# Altium PCB controller.PcbDoc
Units mil, origin at the board's own origin, x right, y up, seen from the top; angles counter-clockwise.
Board outline 2330 x 2070 mil, 2 copper layers (Top Layer, Bottom Layer); 29 components, 28 nets, 115 pads, 8 vias.
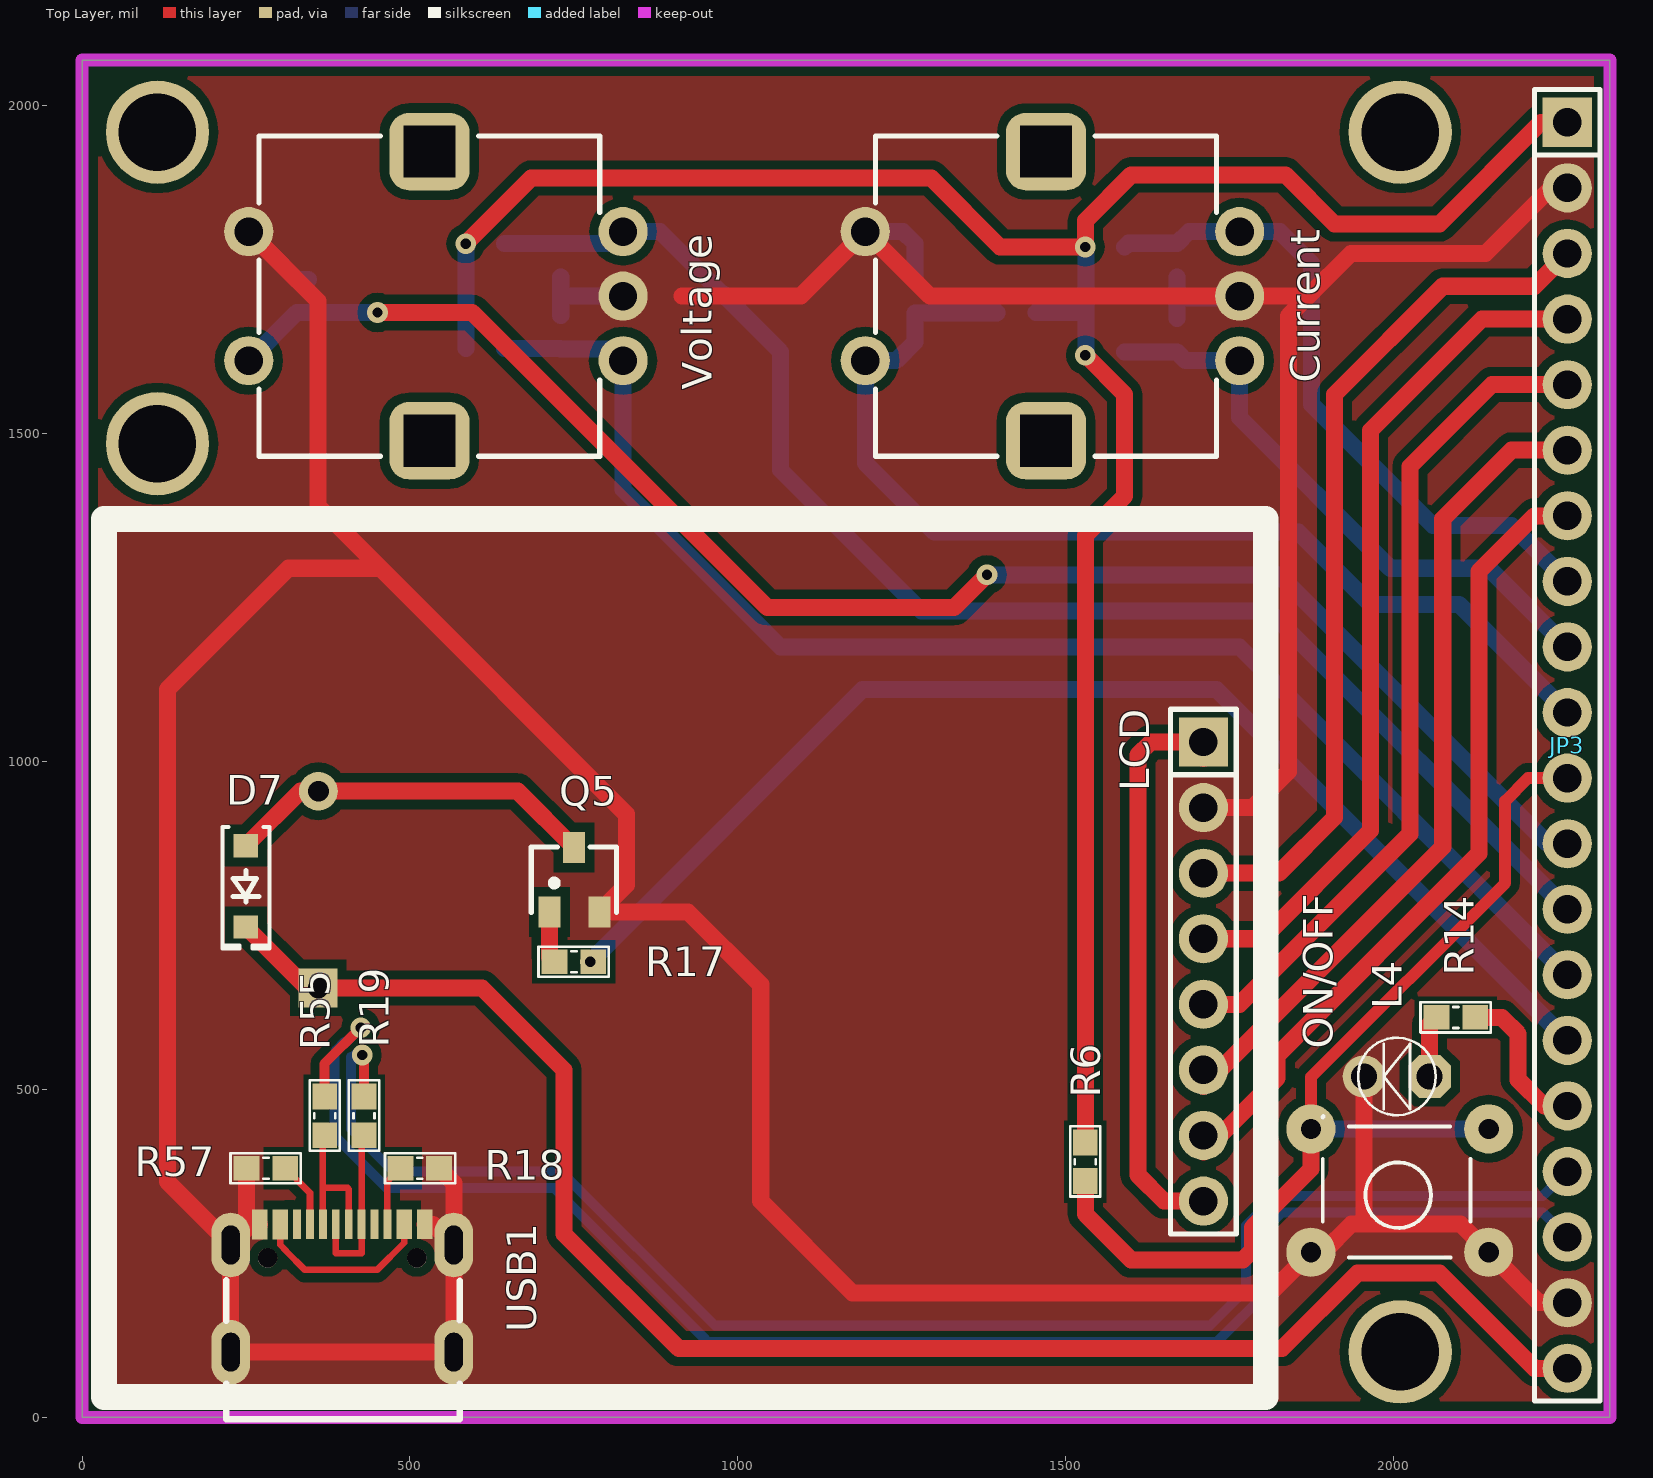
[diagram p0: Top Layer view]
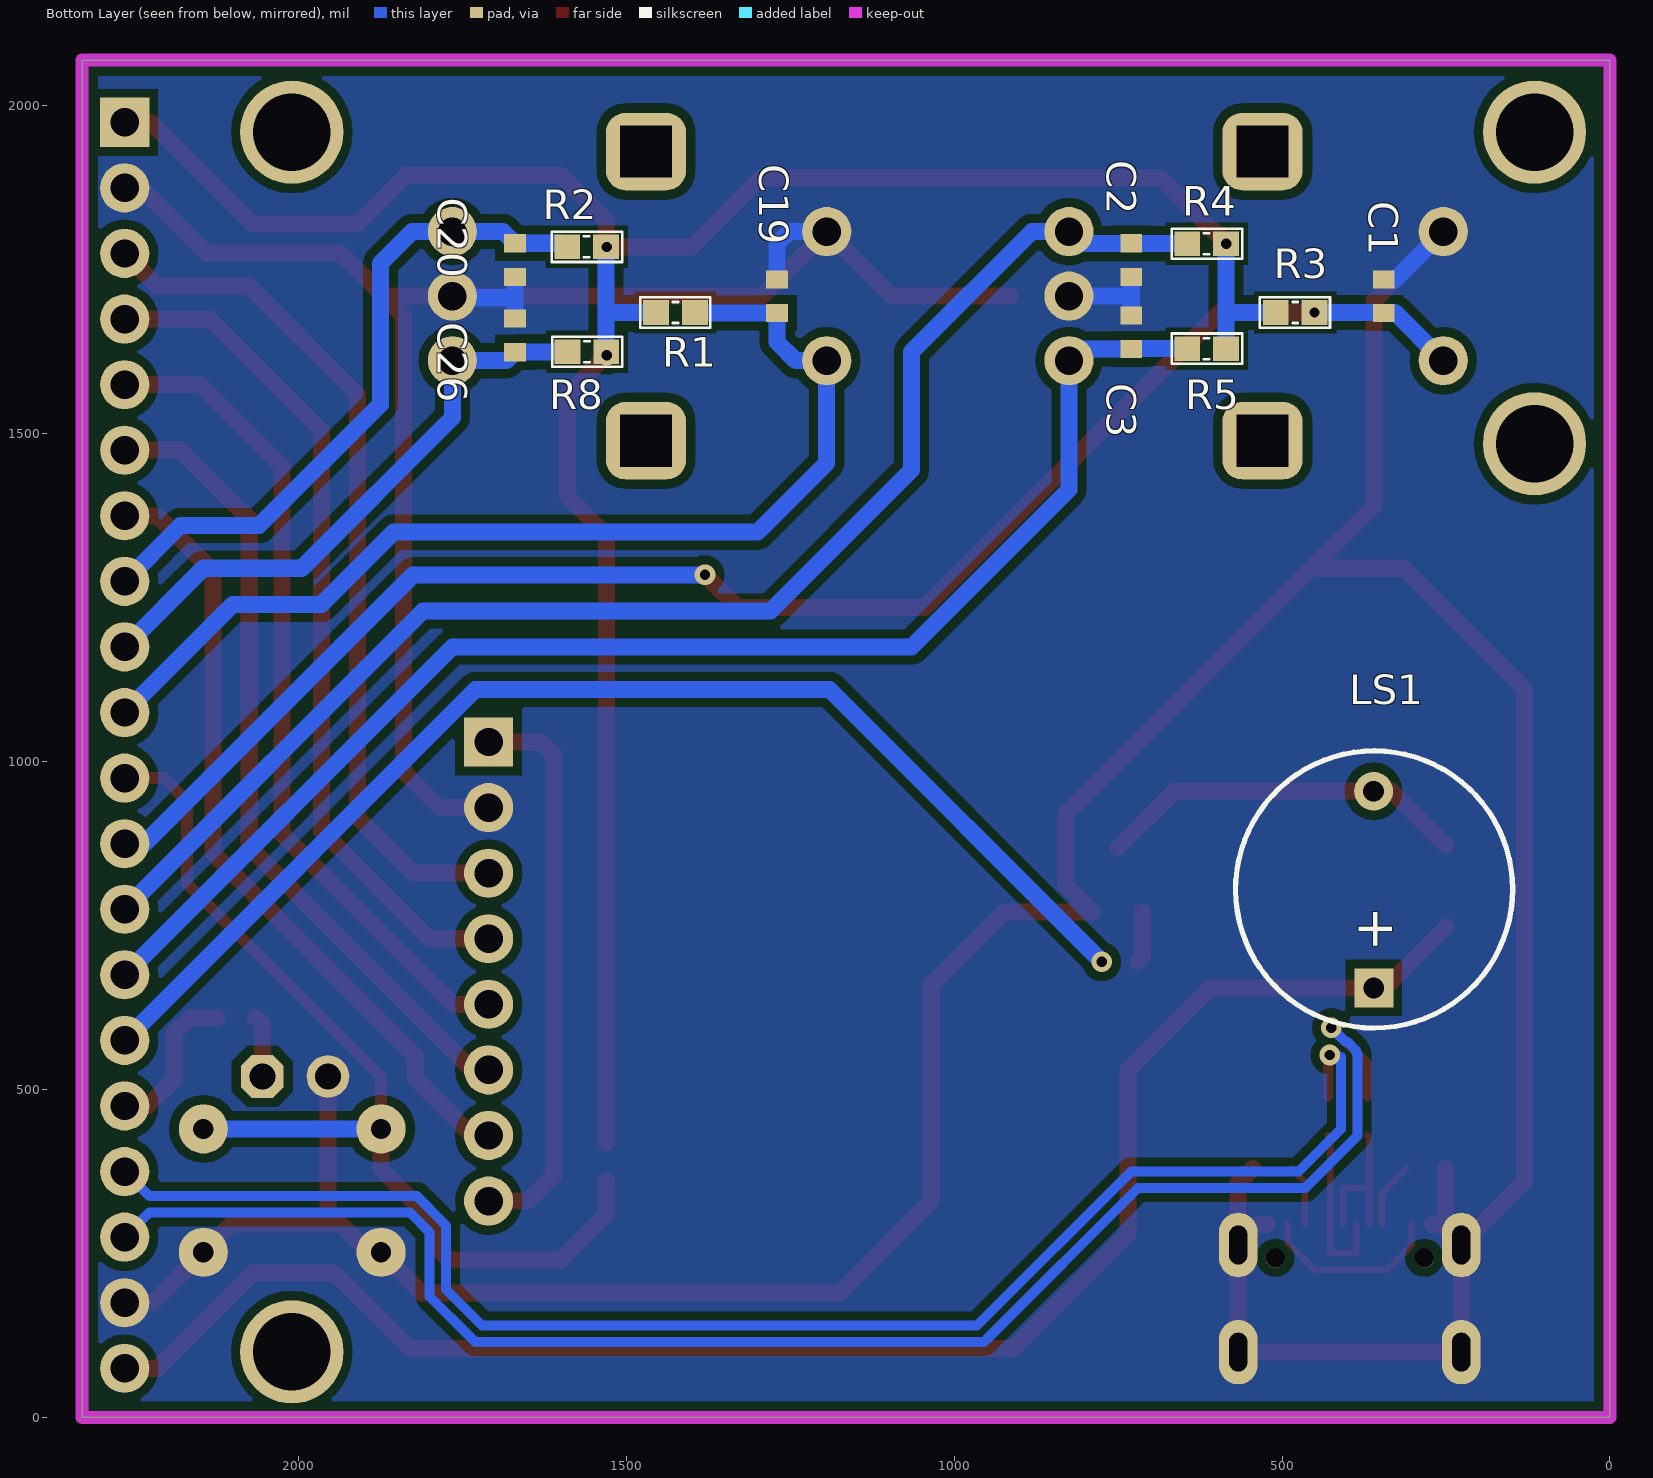
[diagram p1: Bottom Layer view, seen from below]
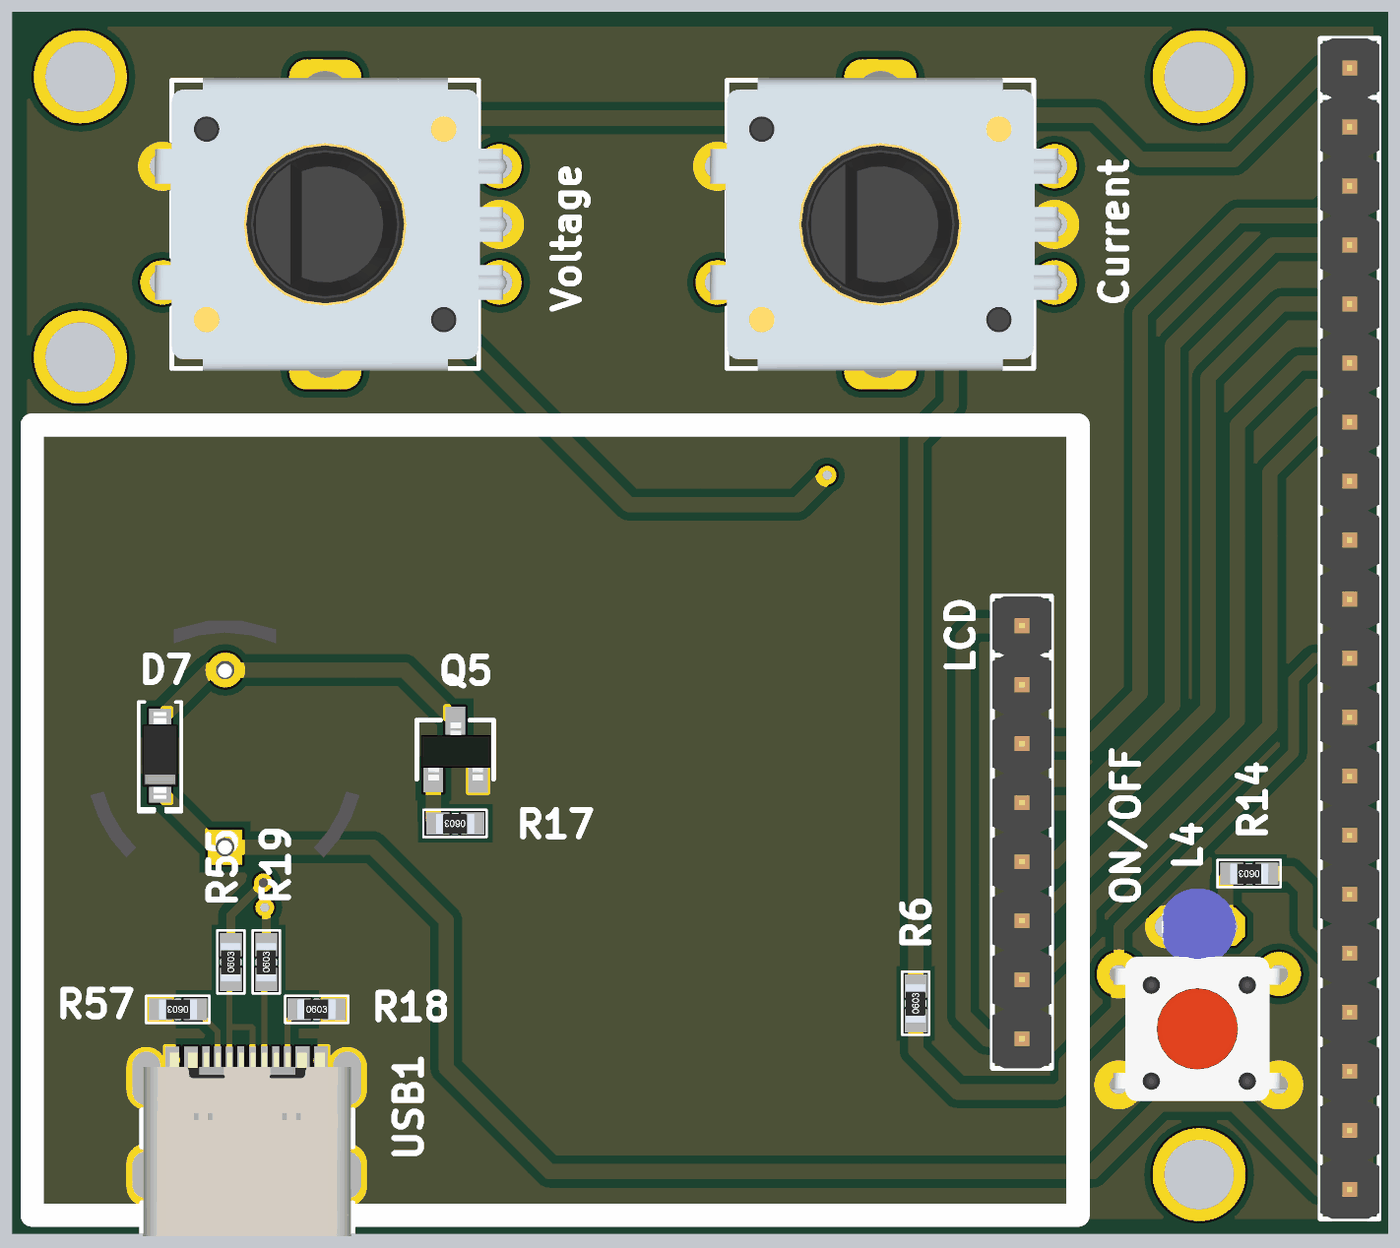
[diagram p2: 3D render of the assembled board from above, using the file's embedded part models]
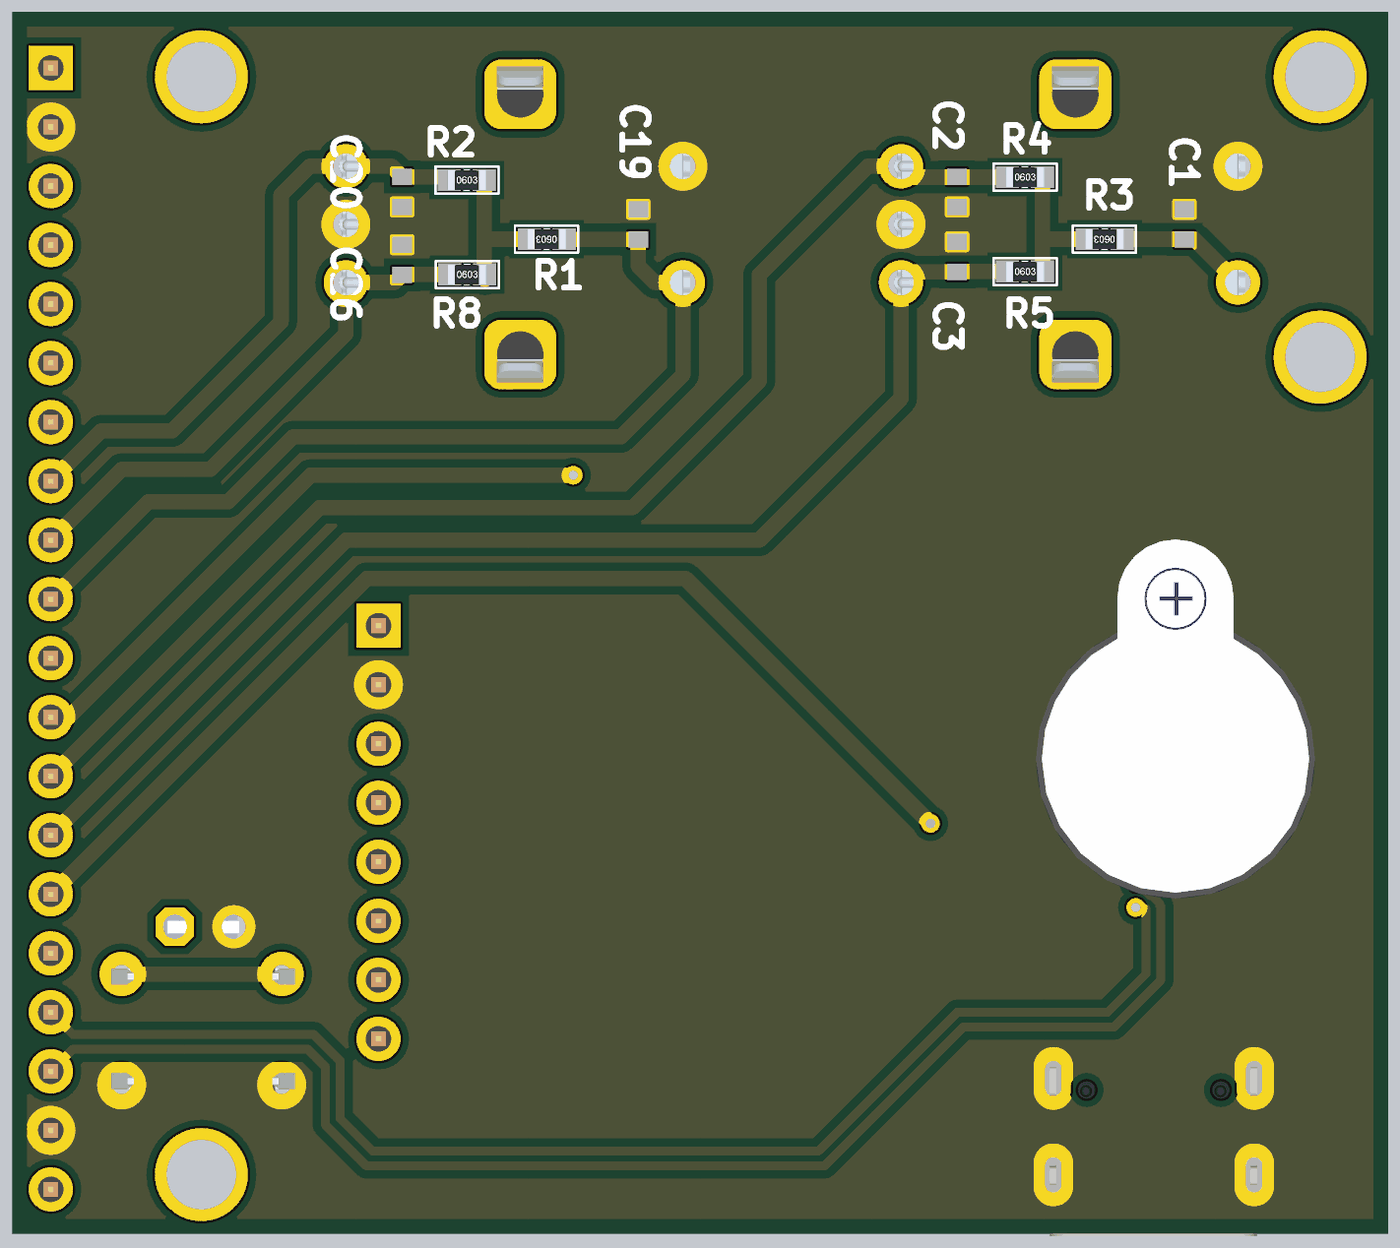
[diagram p3: 3D render of the assembled board from below, using the file's embedded part models]

## Layer stack, top to bottom
Top Solder: solder mask 0.4, Solder Resist, Dk 3.5
Top Layer: signal copper 1.4
Dielectric 1: dielectric 12.6, FR-4, Dk 4.8
Bottom Layer: signal copper 1.4
Bottom Solder: solder mask 0.4, Solder Resist, Dk 3.5

## Board outline
0,0 0,2070 2330,2070 2330,0

## Design rules (kind name [scope] priority, off if disabled: settings)
Clearance [All] p1: gap=14 ignorepadtopadclearanceinfootprint=FALSE
DiffPairsRouting [All] p1: maxlimit=10 minlimit=8 mostfreqgap=10 toplayer_minwidth=8 toplayer_maxwidth=15 toplayer_prefwidth=10 bottomlayer_minwidth=8 bottomlayer_maxwidth=15 bottomlayer_prefwidth=10 maxuncoupledlength=500
PolygonConnect [All] p1: connectstyle=Direct reliefconductorwidth=10 reliefentries=4 polygonreliefangle="90 Angle" airgapwidth=10
RoomDefinition controller [InComponentClass('controller')] p1: confinementstyle=ConfineIn formatcopy=TRUE lockcomponents=FALSE outline 2770,-1440 9400,-1440 9400,680 2770,680
RoutingVias [All] p1: holewidth=15.75 width=31.5 viastyle="Through Hole" minholewidth=15.75 minwidth=31.5 maxholewidth=15.75 maxwidth=31.5
SolderMaskExpansion [All] p1: expansion=4 istentingtop=FALSE
Width [All] p1: maxlimit=26 minlimit=10 preferedwidth=18
29 further rules are at their usual default settings.

## Classes and differential pairs
differential pair USB: +USB_P -USB_N

## Components (designator, comment, footprint, x,y, rotation, side; value= is the part's Value field where it differs from the comment)
C1 "0.1uF" CAPC1608X09L 345,1710 r270 bottom
C2 "0.1uF" CAPC1608X09L 730,1765 r90 bottom
C3 "0.1uF" CAPC1608X09L 730,1655 r270 bottom
C19 "0.1uF" CAPC1608X09L 1270,1710 r270 bottom
C20 "0.1uF" CAPC1608X09L 1670,1765 r90 bottom
C26 "0.1uF" CAPC1608X09L 1670,1650 r270 bottom
Current "482024764004" 482024764004 1470,1710 r0 top locked (schematic designator SW1)
D7 "S4" "DIODE SOD-123" 250,810 r270 top
JP3 "JP 1x20 2.54" "JP 1x20 DT" 2265,1975 r270 top
L4 "LED 3mm" LED-3MM-BLUE 2000,520 r180 top
LCD "lcd_1.8 inch" "JP 1x8 DT" 1710,1030 r270 top (schematic designator JP4)
LS1 "Coi Chip Speaker" "Coi Chip Speacker" 360,655 r90 bottom
ON/OFF "Nut Nhan 4 Chan Cam 6x6" "Nut Nhan 4 Chan Cam 6x6" 2132,244 r180 top (schematic designator BT?)
Q5 "HF" SOT-23 750,820 r0 top value=C9014
R1 "10k" "Tro smd 0603" 1425,1685 r0 bottom
R2 "10k" "Tro smd 0603" 1560.47,1785 r180 bottom
R3 "10k" "Tro smd 0603" 480,1685 r0 bottom
R4 "10k" "Tro smd 0603" 615,1790 r180 bottom
R5 "10k" "Tro smd 0603" 615,1630 r180 bottom
R6 "470RT" "Tro smd 0603" 1530,390 r90 top
R8 "10k" "Tro smd 0603" 1560,1625 r180 bottom
R14 "470RT" "Tro smd 0603" 2095,610 r180 top
R17 "4.7K" "Tro smd 0603" 750,695 r180 top
R18 "5k1" "tro smd 0603" 515,380 r0 top
R19 "10R" "Tro smd 0603" 430,460 r90 top
R55 "10R" "Tro smd 0603" 370,460 r90 top
R57 "5k1" "tro smd 0603" 280.47,380 r180 top
USB1 "Type C 16P" "Type C 16P" 380,145 r0 top
Voltage "482024764004" 482024764004 529.72,1710 r0 top (schematic designator SW2)

## Footprints (in the part's own frame and the unit in brackets; to place one, negate y for a bottom-side part, rotate by r counter-clockwise, add the part's x,y. Pads: shape width x height; smd on the part's side, far side on the other; paste and mask are expansions set on the pad)
482024764004 [mm]
  round 1.905 hole 1.1: 1(-7,-2.5) 2(-7,2.5) A(7.5,-2.5) B(7.5,2.5) C(7.5,0)
  rrect50% 3.1x3 hole 2 square: S1(0,5.6) S2(0,-5.6)
  silkscreen extent -6.6,-6.2 6.6,6.2, body extent -7.32,-6.81 7.8,6.81, height 20.1
CAPC1608X09L [mm]
  rect 0.7x0.85 smd: 1(-0.65,0) 2(0.65,0)
  body extent -0.85,-0.45 0.85,0.45, height 0.9
"Coi Chip Speacker" [mm]
  rect 1.5x1.5 hole 0.8: 1(0,0)
  round 1.5 hole 0.8: 2(7.62,0.013)
  silkscreen extent -1.55,-5.38 9.18,5.36, body extent -2.22,-6 13.24,6, height 4.5
"DIODE SOD-123" [mm] "SOD-123"
  rect 0.9x0.95 smd: 1(-1.575,0) 2(1.575,0)
  silkscreen extent -2.3,-0.92 2.41,0.92, body extent -1.86,-0.78 1.86,0.77, height 1.35
"JP 1x8 DT" [mm] "8 pins, 1 row, straight, gold plating"
  rect 1.905x1.905 hole 1.1: 1(0,0)
  round 1.905 hole 1.1: 2(2.54,0) 3(5.08,0) 4(7.62,0) 5(10.16,0) 6(12.7,0) 7(15.24,0) 8(17.78,0)
  silkscreen extent -1.27,-1.27 19.05,1.27, body extent -1.27,-1.27 19.05,1.27, height 8.54
"JP 1x20 DT" [mm] "20 pins, 1 row, straight, gold plating"
  rect 1.905x1.905 hole 1.1: 1(0,0)
  round 1.905 hole 1.1: 2(2.54,0) 3(5.08,0) 4(7.62,0) 5(10.16,0) 6(12.7,0) 7(15.24,0) 8(17.78,0) 9(20.32,0) 10(22.86,0) 11(25.4,0) 12(27.94,0) 13(30.48,0) 14(33.02,0) 15(35.56,0) 16(38.1,0) 17(40.64,0) 18(43.18,0) 19(45.72,0) 20(48.26,0)
  silkscreen extent -1.27,-1.27 49.53,1.27, body extent -1.27,-1.27 49.53,1.27, height 8.54
LED-3MM-BLUE [mil]
  oct 65x65 hole 40: 1(-55,0)
  round 65 hole 40: 2(45,0)
  silkscreen extent -64,-59 54,59, body extent -72,-65 54,65, height 184
"Nut Nhan 4 Chan Cam 6x6" [mil] "SW button 4pin, 250 x250 mil"
  round 75 hole 31: 1(-13,-8) 1(258,-8) 2(-13,-196) 2(258,-196)
  silkscreen extent 15,-215 240,0, body extent -31,-225 281,19, height 276
SOT-23 [mm] "SOT 23 _ 1-3-2"
  rect 0.85x1.2 smd: 1(-0.94,-1.245) 2(0.985,-1.25) 3(0.005,1.25)
  silkscreen extent -1.65,-1.27 1.65,1.27, body extent -1.47,-1.33 1.53,1.17, height 1.06
"Tro smd 0603" [mm] "Chip Capacitor, 2-Leads, Body 1,60x0,80mm, IPC Medium Density"
  rect 1x0.95 smd mask+0.076: 1(-0.75,0) 2(0.75,0)
  silkscreen extent -1.35,-0.58 1.37,0.58, body extent -0.82,-0.42 0.82,0.43, height 0.44
"tro smd 0603" [mm] "Chip Capacitor, 2-Leads, Body 1,60x0,80mm, IPC Medium Density"
  rect 1x0.95 smd mask+0.076: 1(-0.75,0) 2(0.75,0)
  silkscreen extent -1.35,-0.58 1.37,0.58, body extent -0.82,-0.42 0.82,0.43, height 0.44
"Type C 16P" [mm]
  oval 1.5x2.5 hole 0.7 slot 1.5 at 90 deg: 0(-3.893,-1.152) 0(-3.893,2.998) 0(4.747,-1.152) 0(4.747,2.998)
  rect 0.6x1.15 smd: A1(-2.773,3.793) A4(-1.973,3.793) A9(2.827,3.797) A12(3.627,3.797)
  rect 0.3x1.15 smd: A5(-0.823,3.798) A6(0.177,3.798) A7(0.677,3.796) A8(1.677,3.798) B5(2.177,3.798) B6(1.177,3.798) B7(-0.323,3.796) B8(-1.323,3.797)
  round 0.75 hole 0.75 unplated: ""(-2.463,2.498) ""(3.317,2.498)
  silkscreen extent -4.07,-3.75 4.98,1.62, body extent -4.02,-3.8 4.92,4.1, height 3.21

## Part data
C1 C2 C3 C19 C20 C26: library part GRM188R71H104KA93D, "CAP CER 0.1UF 50V X7R 0603", Manufacturer="Murata Electronics North America", Operating Temperature="-55°C ~ 125°C", Package / Case="0603 (1608 Metric)", Ratings=-, Supplier Part Number 1=490-1519-2-ND, Temperature Coefficient=X7R, Tolerance=±10%, Voltage - Rated=50V, Applications="General Purpose", Capacitance=0.1uF, Category=Capacitors, ComponentLink1Description=http://www.murata.com/~/media/webrenewal/support/library/catalog/products/capacitor/mlcc/c02e.ashx?la=en-us, ComponentLink1URL=http://www.murata.com/~/media/webrenewal/support/library/catalog/products/capacitor/mlcc/c02e.ashx?la=en-us, Features=-, Height - Seated (Max)=-, Lead Spacing=-, Lead Style=-, Manufacturer Part Number=GRM188R71H104KA93D, Mounting Type="Surface Mount, MLCC", Packaging="Tape & Reel (TR)", Part Status=Active, Pricing 1="4000=0.01822, 8000=0.01663, 12000=0.01584 (USD)", Pricing 2="1=0.12, 10=0.084, 100=0.0396, 500=0.02778, 1000=0.023 (USD)", RoHS="RoHS Compliant", Size / Dimension="0.063\" L x 0.032\" W (1.60mm x 0.80mm)", Stock=19812000, Supplier 1=Digi-Key, Supplier 2=Digi-Key, Supplier Part Number 2=490-1519-1-ND, Thickness (Max)="0.035\" (0.90mm)"
Current Voltage: "WS-ENTV Mechanical Incremental Encoder Switch, Plastic Shaft without bushing, 24Pulse/360°, 24positi", Insulation Resistance=100MΩ, Manufacturer="Wurth Elektronik", Operating Temperature Max=85°C, Operating Temperature Min=-40°C, Rated Current=10mA, Category="Encoder Switches", ComponentLink1Description="Website Link", ComponentLink1URL=https://www.we-online.com/redexpert/article/482024764004?ad, ComponentLink2Description="Datasheet Link", ComponentLink2URL=https://www.we-online.com/redexpert/spec/482024764004?ad, Detent=24positions, Electrical Life Encoder=30000Cycles, Electrical Life Switch=20000Cycles, Height=20mm, Length=13.2mm, Manufacturer Part Number=482024764004, Match Code=WS-ENTV, Mount="Through Hole", Operation Force=300g, Packaging=Tray, Resolution=24Pulse/360°, Width=12.4mm
D7: library part "Diode S4", "Dán", Chung_Loai=Dán, Don_Vi=Con, Ma_Hang=MH005519, Ten_Linh_Kien="Diode S4 SOD123 ( 1N5819 SOD123)"
JP3: library part "JP 1x20 2.54 Duc Thang", "Cắm", Chung_Loai=Cắm, Don_Vi=Con, Ma_Hang=MH000903, Ten_Linh_Kien="Jump Đơn Đực 2.54MM 1x40P Thẳng 11MM"
L4: library part "LED 3mm Xanh Duong", "Cắm", Chung_Loai=Cắm, Don_Vi=Con, Ma_Hang=MH009003, Ten_Linh_Kien="LED 3MM Xanh Dương SS (1000c)"
LCD: library part "JP 1x8 2.54 Duc Thang", "Cắm", Chung_Loai=Cắm, Don_Vi=Con, Ma_Hang=MH000903, Ten_Linh_Kien="Jump Đơn Đực 2.54MM 1x40P Thẳng 11MM"
LS1: "Còi chip"
ON/OFF: "Nut Nhan 4 Chan 6x6mm", Ma_Hang=MH004584, Ten="Nút Nhấn 4 Chân 6x6x5MM DIP"
Q5: library part "Trans C1815 HF SMD", "SOT-23"
R1 R2 R3 R4 R5 R6 R8 R14 R17 R19 R55: library part "Tro 0603 5% 10R", "Dán", Chung_Loai=Dán, Don_Vi=Con, Ma_Hang=MH006317, So_Chan=2, Ten_Linh_Kien="Trở 0603 5% 10R"
R18 R57: library part "Tro 0603 5% 51k", "Dán", Chung_Loai=Dán, Don_Vi=Con, Ma_Hang=MH007666, So_Chan=2, Ten_Linh_Kien="Trở 0603 5% 51k"

## Free pads (board coordinates)
  round 157.48 hole 118.11: 7(115,1485) 7(115,1960) 7(2010,100) 7(2010,1960)

## Via types
v1: diameter 31.5, hole 15.75, Top Layer to Bottom Layer, 8 vias

## Nets (pads, with @x,y where several pads share a name; then routed paths per layer and width w, separated by ;. In a path a pad name is that pad's centre, name@x,y a point inside that pad or via, vN(x,y) a via of type N, cw(c..) or ccw(c..) an arc to the next point about the centre after c; other vN are vias at no path point)
3v3: LCD.1 LCD.8 | length 864.9
  Top Layer w26: LCD.8 1650,330 1610,370 1610,1010 1630,1030 LCD.1
+5: D7.2 JP3.20 LS1.1 | length 2535.5
  Top Layer w26: D7.2 342.99,655 LS1.1 610,655 735,530 735,280 910,105 1830,105 1945,220 2070,220 2215,75 JP3.20
A0: JP3.5 LCD.5 | length 1274.5
  Top Layer w26: LCD.5 1765,630 2025,890 2025,1450 2150,1575 JP3.5
BT1: JP3.11 ON/OFF.2 R6.1 | length 1565.7
  Top Layer w18: ON/OFF.2@1874,440 1874,519 2170,815 2170,940 2205,975 JP3.11
  Top Layer w26: R6.1 1530,310 1600,240 1770,240 1785,255 1785,290 1874,379 1874,404 ON/OFF.2@1874,440
  Bottom Layer w26: ON/OFF.2@1874,440 ON/OFF.2@2145,440
BT2: C1.2 JP3.12 R3.1 Voltage.1 | length 2418.2
  Top Layer w26: v1(450.47,1685) 595,1685 1045,1235 1330,1235 v1(1380,1285)
  Bottom Layer w26: Voltage.1 327.56,1685 v1(450.47,1685) ; v1(1380,1285) 1825,1285 2235,875 JP3.12
BT3: C2.2 JP3.13 R4.1 Voltage.B | length 2161.6
  Bottom Layer w26: R4.1 806.57,1790 Voltage.B 881.57,1808.43 1065,1625 1065,1445 1280,1230 1810,1230 JP3.13
BT4: C3.2 JP3.14 R5.1 Voltage.A | length 2131.2
  Bottom Layer w26: R5.1 729.41,1630 C3.2 807.17,1629.41 Voltage.A 825,1415 1065,1175 1765,1175 JP3.14
buzzer: JP3.15 R17.1 | length 1883.5
  Bottom Layer w26: v1(775,695) 1190,1110 1730,1110 JP3.15
CS: JP3.3 LCD.3 | length 1324.3
  Top Layer w26: LCD.3 1825,830 1910,915 1910,1560 2075,1725 2215,1725 JP3.3
enc_a: C20.2 Current.B JP3.8 R2.1 | length 1031.6
  Bottom Layer w26: R2.1 1595.59,1790.59 C20.2 1687.83,1808.43 Current.B 1826.57,1808.43 1875,1760 1875,1545 2060,1360 2180,1360 JP3.8
enc_b: C26.2 Current.A JP3.9 R8.1 | length 912.7
  Bottom Layer w26: R8.1 1669.41,1625 C26.2 1682.83,1611.57 Current.A 1765.28,1524.72 1995,1295 2145,1295 JP3.9
enc_c: C19.2 Current.1 JP3.10 R1.1 | length 1641.7
  Bottom Layer w26: R1.1 1394.88,1684.41 C19.2 1270,1640 1241.57,1611.57 Current.1 1194.41,1455.59 1300,1350 1855,1350 1965,1240 2100,1240 JP3.10
GND: C1.1 C2.1 C3.1 C19.1 C20.1 C26.1 Current.2 Current.C JP3.2 JP3.19 L4.2 LCD.2 ON/OFF.1 Q5.2 R18.2 R57.2 USB1.0 USB1.A1 USB1.A12 Voltage.2 Voltage.C | length 8773.1
  Top Layer w26: R57.2 USB1.0@250.94,287.23 ; Voltage.2 360,1702.56 360,1390 455,1295 ; USB1.A1 258.06,294.35 USB1.0@250.94,287.23 ; USB1.A12 535.39,294.51 USB1.0@566.89,263.01 ; R18.2 566.89,357.64 USB1.0@566.89,263.01 ; 915,1710 1095.98,1710 Current.2 1292.83,1710 Current.C 1870,1710 ; LCD.2 1785,930 1840,985 1840,1680 1870,1710 ; L4.2 1955,295 ; JP3.19 2222,175 2145,252 2102,295 1955,295 ; JP3.2 2240,1875 2140,1775 1935,1775 1870,1710 ; USB1.0@226.73,263.01 130,359.74 130,1110 315,1295 455,1295 ; USB1.0@226.73,263.01 226.73,99.63 566.89,99.63 USB1.0@566.89,263.01 ; USB1.0@226.73,263.01 USB1.0@250.94,287.23 ; 455,1295 830,920 830,811.99 Q5.2 924.21,770.79 1035,660 1035,330 1175,190 1812,190 1874,252 1892.9,252 1935.9,295 1955,295
  Bottom Layer w26: Voltage.2 326.97,1735.59 C1.1 ; C3.1 730,1710 ; C2.1 730,1710 ; Voltage.C 730,1710 ; Current.2 1251.57,1808.43 1270,1790 C19.1 ; C26.1 1670,1707.5 ; C20.1 1670,1707.5 ; Current.C 1762.78,1707.5 1670,1707.5
led: JP3.16 R14.1 | length 237.4
  Top Layer w26: R14.1 2165,610 2190,585 2190,515 2230,475 JP3.16
MOSI: JP3.6 LCD.6 | length 1274.7
  Top Layer w26: LCD.6@1710,505 LCD.6@1735,530 ; LCD.6 LCD.6@1735,530 ; JP3.6 2180,1475 2075,1370 2075,870 LCD.6@1735,530
NetD7_1: D7.1 LS1.2 Q5.3 | length 570.1
  Top Layer w26: D7.1 332.99,955 LS1.2 664.41,955 Q5.3
NetL4_1: L4.1 R14.2 | length 94.3
  Top Layer w26: L4.1 2055,599.53 R14.2
NetQ5_1: Q5.1 R17.2 | length 79.1
  Top Layer w26: Q5.1 713,702.47 R17.2
NetR18_1: R18.1 USB1.B5 | length 93.7
  Top Layer w10: USB1.B5 465.7,360.23 R18.1
NetR19_1: R19.1 USB1.A6 USB1.B6 | length 265.2
  Top Layer w10: USB1.A6 386.97,250.36 426.34,250.36 USB1.B6 426.34,426.81 R19.1
NetR55_1: R55.1 USB1.A7 USB1.B7 | length 231.3
  Top Layer w10: USB1.B7 367.28,349.55 ; R55.1 367.28,427.75 367.28,349.55 ; USB1.A7 406.65,348.35 405,350 367.72,350 367.28,349.55
NetR57_1: R57.1 USB1.A5 | length 101.1
  Top Layer w10: R57.1 347.6,342.4 USB1.A5
RST: JP3.4 LCD.4 | length 1303.8
  Top Layer w26: LCD.4 1800,730 1965,895 1965,1505 2135,1675 JP3.4
SCK: JP3.7 LCD.7 | length 1229.2
  Top Layer w26: LCD.7@1710,405 1822.5,517.5 1822.5,552.5 2130,860 2130,1290 2215,1375 JP3.7
USB_N: JP3.18 R55.2 | length 2475.9
  Top Layer w15: R55.2 370,539.5 v1(425,594.5)
  Bottom Layer w15: v1(425,594.5) 403.5,573 400.47,573 387,559.53 387,556.5 385,554.5 385,429.64 464.64,350 719.64,350 947.32,122.32 954.64,115 1730.36,115 1737.68,122.32 1800,184.64 1800,282.5 1830,312.5 2227.5,312.5 JP3.18
USB_P: JP3.17 R19.2 | length 2328.5
  Top Layer w15: v1(427.35,552.65) 430,550 R19.2
  Bottom Layer w15: v1(427.35,552.65) 425,555 418.03,555 413.03,550 410,550 410,440 475,375 730,375 965,140 1720,140 1775,195 1775,292.86 1819.64,337.5 2227.5,337.5 JP3.17
VBUS: USB1.A4 USB1.A9 | length 281.6
  Top Layer w10: USB1.A4 302.32,263.31 310.8,254.83 310.8,254.2 340,225 450,225 491.3,266.3 USB1.A9
VCC: JP3.1 R1.2 R2.2 R3.2 R4.2 R5.2 R6.2 R8.2 | length 3656.1
  Top Layer w26: v1(585,1790) 685,1890 1295,1890 1400,1785 v1(1530,1785) 1530,1825 1600,1895 1835,1895 1910,1820 2070,1820 2225,1975 JP3.1 ; R6.2 1530,1345 1590,1405 1590,1560 v1(1530,1620)
  Bottom Layer w26: R3.2 580.47,1685 585.47,1690 ; R5.2 585.47,1690 ; R4.2 585.47,1690 ; R1.2 1525.94,1685 1530.94,1680 ; R8.2 1530.94,1625.47 1530.94,1680 ; R2.2 1530.94,1680
pads on no net: Current.S1 Current.S2 USB1. USB1.A8 USB1.B8 Voltage.S1 Voltage.S2

## Polygon pours and split planes (outlines as drawn)
GND on Top Layer "GND_L01_P000" (solid, pour order 0): 0,0 0,2070 2330,2070 2330,0
GND on Bottom Layer "GND_L02_P001" (solid, pour order 1): 0,0 0,2070 2330,2070 2330,0

## Keep-outs
Keep-Out Layer:
  the board outline again, w20

## Silkscreen, mask and mechanical layers (free items; w line width, h text height)
Top Overlay:
  lines w39.37: 33.35,31.42 1805,31.42 1805,1370 33.35,1370 33.35,31.42

## Text inside footprints (layer, text, board x,y; h text height)
LS1: Bottom Overlay "+" at 332,710.5 h60 r270